# EAGLE board GB202-CC-from-SF-Base (EAGLE 7.2.0)
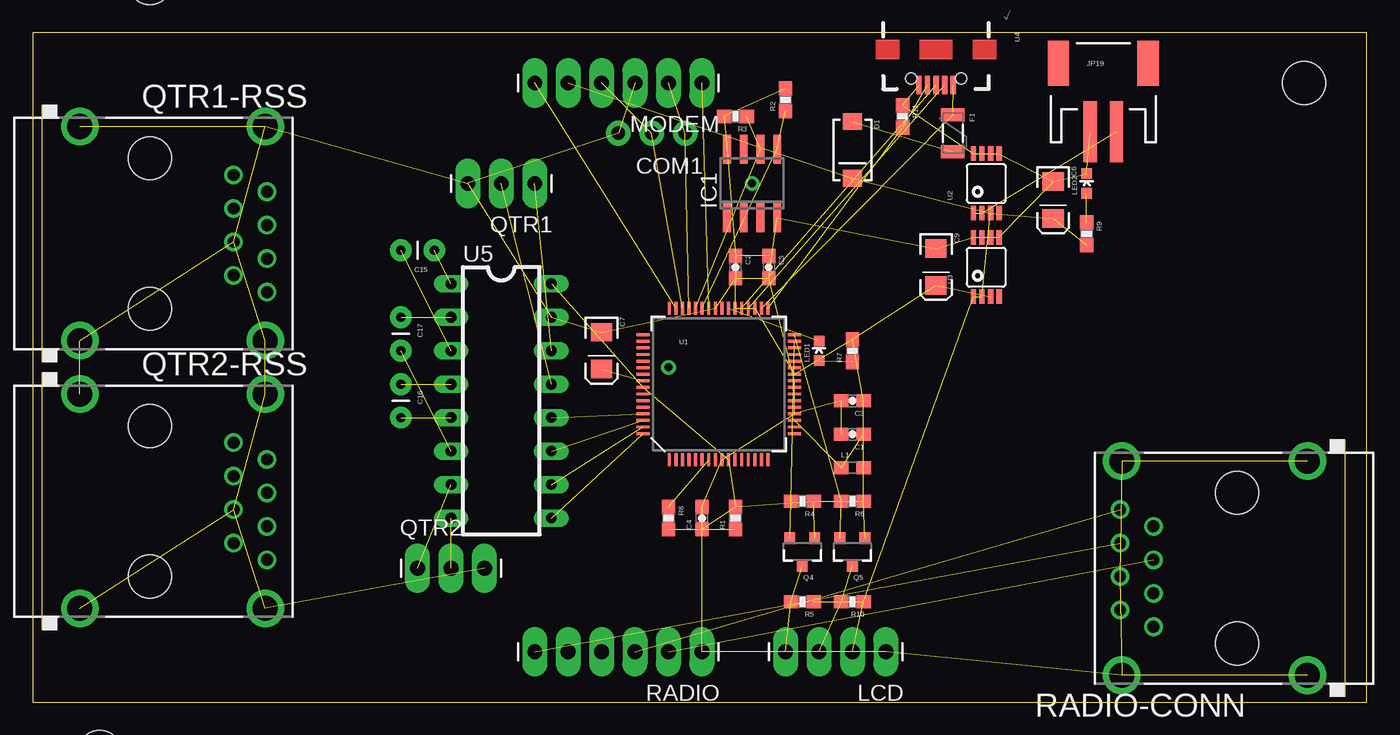
[diagram p0: board, top side]
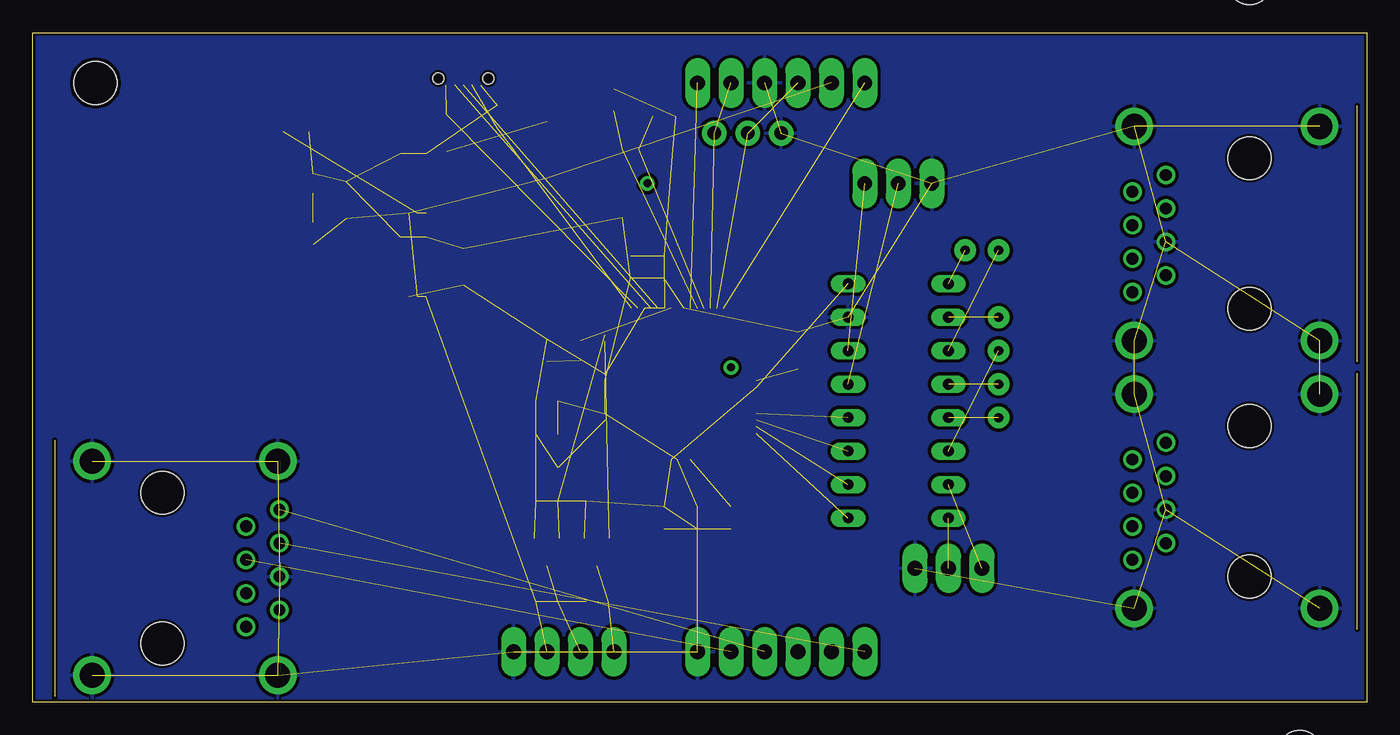
[diagram p1: board, bottom side, seen from below]

Size 101.27 x 50.79 mm. Coordinates in mm from the lower left corner, seen from the top.
Outline: 0,0 101.27,0 101.27,50.79 0,50.79 0,0
Copper layers (1*16): Top 0.035mm / dielectric 1.5mm / Bottom 0.035mm
Design rules "SparkFun-2-layer-STANDARD": minimum track width 10mil, minimum drill 20mil, track to track 10mil, track to pad 8mil, pad to pad 8mil, via to via 10mil, smd to smd 8mil, copper to edge 8mil, drill to drill 8mil, minimum pad ring 10mil, minimum via ring 10mil, stop-mask expansion 4mil, vias tented up to drill 20mil, thermal gap 10mil

## Footprints (pad centres in the part's own frame; a part is rotated, then mirrored left to right if it is on the bottom)
0603-CAP = smd 1.1 x 1: 1 -0.85,0; 2 0.85,0
EIA3216 = smd 1.4 x 1.6: A 1.4,0; C -1.4,0
CAP-PTH-SMALL = drill 0.7 pad 1.651: 1 0,0; 2 2.54,0
1X03_NO_SILK = drill 1.016 pad 1.88: 1 0,0; 2 2.54,0; 3 5.08,0
SMA-DIODE = smd 1.27 x 1.47: A -2.15,0; C 2.15,0
PTC-1206 = smd 1 x 1.8: 1 -1.4,0; 2 1.4,0
SO-08 = smd 0.6 x 2.2: 1 -1.905,-2.6; 2 -0.635,-2.6; 3 0.635,-2.6; 4 1.905,-2.6; 5 1.905,2.6; 6 0.635,2.6; 7 -0.635,2.6; 8 -1.905,2.6
STAND-OFF = hole 3.302: 0,0
JST-2-SMD = smd 1 x 4.6: 1 -1,-3.7; 2 1,-3.7 | smd 1.6 x 3.4: NC1 -3.4,1.5; NC2 3.4,1.5
0603 = smd 1.1 x 1: 1 -0.85,0; 2 0.85,0
1X04_LONGPADS = drill 1.118 pad 1.88 long: 1 0,0; 2 2.54,0; 3 5.08,0; 4 7.62,0
LED-0603 = smd 0.8 x 0.8: A 0,-0.75; C 0,0.75
1X06_LONGPADS = drill 1.118 pad 1.88 long: 1 0,0; 2 2.54,0; 3 5.08,0; 4 7.62,0; 5 10.16,0; 6 12.7,0
SOT23-3 = smd 0.8 x 0.9: 1 -0.95,-1; 2 0.95,-1; 3 0,1.1
1X03_LONGPADS = drill 1.118 pad 1.88 long: 1 0,0; 2 2.54,0; 3 5.08,0
RJ45-SHIELD2 = drill 0.9 pad 1.4: 1 -4.445,6.35; 2 -3.175,8.89; 3 -1.905,6.35; 4 -0.635,8.89; 5 0.635,6.35; 6 1.905,8.89; 7 3.175,6.35; 8 4.445,8.89 | drill 1.9 pad 2.5: S1 -8.128,-5.33; S2 8.128,-5.33; S3 -8.128,8.76; S4 8.128,8.76 | hole 3.251: -5.715,0; 5.715,0
0603-RES = smd 1.1 x 1: 1 -0.85,0; 2 0.85,0
PIC24FXXX_TQFP64 = smd 0.22 x 1: 1 -3.75,-5.75; 2 -3.25,-5.75; 3 -2.75,-5.75; 4 -2.25,-5.75; 5 -1.75,-5.75; 6 -1.25,-5.75; 7 -0.75,-5.75; 8 -0.25,-5.75; 9 0.25,-5.75; 10 0.75,-5.75; 11 1.25,-5.75; 12 1.75,-5.75; 13 2.25,-5.75; 14 2.75,-5.75; 15 3.25,-5.75; 16 3.75,-5.75; 33 3.75,5.75; 34 3.25,5.75; 35 2.75,5.75; 36 2.25,5.75; 37 1.75,5.75; 38 1.25,5.75; 39 0.75,5.75; 40 0.25,5.75; 41 -0.25,5.75; 42 -0.75,5.75; 43 -1.25,5.75; 44 -1.75,5.75; 45 -2.25,5.75; 46 -2.75,5.75; 47 -3.25,5.75; 48 -3.75,5.75 | smd 1 x 0.22: 17 5.75,-3.75; 18 5.75,-3.25; 19 5.75,-2.75; 20 5.75,-2.25; 21 5.75,-1.75; 22 5.75,-1.25; 23 5.75,-0.75; 24 5.75,-0.25; 25 5.75,0.25; 26 5.75,0.75; 27 5.75,1.25; 28 5.75,1.75; 29 5.75,2.25; 30 5.75,2.75; 31 5.75,3.25; 32 5.75,3.75; 49 -5.75,3.75; 50 -5.75,3.25; 51 -5.75,2.75; 52 -5.75,2.25; 53 -5.75,1.75; 54 -5.75,1.25; 55 -5.75,0.75; 56 -5.75,0.25; 57 -5.75,-0.25; 58 -5.75,-0.75; 59 -5.75,-1.25; 60 -5.75,-1.75; 61 -5.75,-2.25; 62 -5.75,-2.75; 63 -5.75,-3.25; 64 -5.75,-3.75
MSOP8 = smd 0.4 x 1.1: 1 -0.975,-2.25; 2 -0.325,-2.25; 3 0.325,-2.25; 4 0.975,-2.25; 5 0.975,2.25; 6 0.325,2.25; 7 -0.325,2.25; 8 -0.975,2.25
USB-AB-MICRO-SMD_V03 = smd 1.4 x 0.4: D+1 2.7,0; D-1 2.7,0.65; GND1 2.7,-1.3; ID1 2.7,-0.65; VBUS1 2.7,1.3 | hole 0.85: 2.2,1.9; 2.2,-1.9
DIL16 = drill 0.813 long: 1 -8.89,-3.81; 2 -6.35,-3.81; 3 -3.81,-3.81; 4 -1.27,-3.81; 5 1.27,-3.81; 6 3.81,-3.81; 7 6.35,-3.81; 8 8.89,-3.81; 9 8.89,3.81; 10 6.35,3.81; 11 3.81,3.81; 12 1.27,3.81; 13 -1.27,3.81; 14 -3.81,3.81; 15 -6.35,3.81; 16 -8.89,3.81

## Placement (x,y rotation side)
C1  0.1uF  [0603-CAP]  62.23,20.32 180 top
C2  0.1uF  [0603-CAP]  53.34,33.02 270 top
C3  0.1uF  [0603-CAP]  62.23,22.86 180 top
C4  0.1uF  [0603-CAP]  50.8,13.97 90 top
C5  0.1uF  [0603-CAP]  55.88,33.02 270 top
C6  10uf  [EIA3216]  77.47,38.1 270 top
C7  10uF  [EIA3216]  43.18,26.67 270 top
C9  10uf  [EIA3216]  68.58,33.02 270 top
C15  .1  [CAP-PTH-SMALL]  30.48,34.29 180 top
C16  .1  [CAP-PTH-SMALL]  27.94,24.13 270 top
C17  .1  [CAP-PTH-SMALL]  27.94,29.21 270 top
COM1  [1X03_NO_SILK]  49.53,43.18 180 top
D1  DIODE-SCHOTTKY_  [SMA-DIODE]  62.23,41.91 270 top
F1  PTCSMD  [PTC-1206]  69.85,43.18 270 top
IC1  24LCS61SN  [SO-08]  54.61,39.37 0 top
JP10  STAND-OFF  [STAND-OFF]  5.08,-3.81 0 top  (outside the outline)
JP11  STAND-OFF  [STAND-OFF]  107.95,5.08 0 top  (outside the outline)
JP12  STAND-OFF  [STAND-OFF]  96.52,46.99 0 top
JP13  STAND-OFF  [STAND-OFF]  8.89,54.61 0 top  (outside the outline)
JP19  JST Connector  [JST-2-SMD]  81.28,46.99 0 top
L1  30Ohm,1.8A  [0603]  62.23,17.78 0 top
LCD  [1X04_LONGPADS]  64.77,3.81 180 top
LED1  LY L29K-J1K2-26-Z  [LED-0603]  59.69,26.67 0 top
LED2  LS L29K-G1J2-1-Z  [LED-0603]  80.01,39.37 0 top
MODEM  [1X06_LONGPADS]  50.8,46.99 180 top
Q4  BSS138  [SOT23-3]  58.42,11.43 180 top
Q5  BSS138  [SOT23-3]  62.23,11.43 180 top
QTR1  [1X03_LONGPADS]  38.1,39.37 180 top
QTR1-RSS  RJ45-8L2-S  [RJ45-SHIELD2]  8.89,35.56 270 top
QTR2  [1X03_LONGPADS]  29.21,10.16 0 top
QTR2-RSS  RJ45-8L2-S  [RJ45-SHIELD2]  8.89,15.24 270 top
R1  10k  [0603-RES]  53.34,13.97 90 top
R2  4.7K  [0603-RES]  57.15,45.72 90 top
R3  4.7K  [0603-RES]  53.34,44.45 180 top
R4  10K  [0603-RES]  58.42,15.24 180 top
R5  10K  [0603-RES]  58.42,7.62 180 top
R6  10K  [0603-RES]  62.23,15.24 180 top
R7  750  [0603-RES]  62.23,26.67 90 top
R8  470  [0603-RES]  48.26,13.97 270 top
R9  1.6k  [0603-RES]  80.01,35.56 270 top
R10  10K  [0603-RES]  62.23,7.62 180 top
R11  DNP  [0603-RES]  66.04,44.45 270 top
RADIO  [1X06_LONGPADS]  50.8,3.81 180 top
RADIO-CONN  RJ45-8L2-S  [RJ45-SHIELD2]  91.44,10.16 90 top
U1  PIC24FJ256GB206  [PIC24FXXX_TQFP64]  52.07,24.13 0 top
U2  VREG_MIC5216  [MSOP8]  72.39,39.37 0 top
U3  VREG_MIC5216  [MSOP8]  72.39,33.02 0 top
U4  [USB-AB-MICRO-SMD_V03]  68.58,49.53 270 top
U5  MAX232PTH  [DIL16]  35.56,22.86 270 top

## Library data of the parts
C1-C6 C9 C15-C17 = SparkFun-Capacitors
C7 JP10-JP13 JP19 LED2 Q4 Q5 R4-R6 R10 R11 = SparkFun
COM1 MODEM QTR1 QTR2 RADIO = SparkFun-Connectors
D1 = SparkFun-DiscreteSemi
F1 U2 U3 = SparkFun-PowerIC
IC1 = microchip; OC_FARNELL: unknown; OC_NEWARK: unknown
L1 = SparkFun-Passives
LCD = SparkFun-Connectors; PROD_ID: CONN-09696
LED1 = SparkFun-LED
QTR1-RSS QTR2-RSS RADIO-CONN = con-tycoelectronics; MF: TYCO ELECTRONICS; MPN: RJ45-8L2-S; OC_FARNELL: unknown; OC_NEWARK: 52K4446
R1-R3 R7-R9 = SparkFun-Resistors
U1 U5 = SparkFun-DigitalIC
U4 = Testing

## Nets
3.3V: C2.1 C3.1 C4.1 C5.1 C9.A IC1.8 L1.2 Q4.1 Q5.1 R1.2 R2.2 R3.2 R4.1 R6.1 R7.2 U1.10 U1.26 U1.35 U1.38 U1.57 U3.3 U5.16
5V: C6.A D1.C LCD.2 MODEM.5 R5.1 R9.2 R10.1 U2.3 U3.1 U3.2
BOOT: LED1.C U1.39
D+: U1.37 U4.D+1
D-: U1.36 U4.D-1
ETH-SPI: U1.53
ETH-SPI2: U1.52
ETH-SPI3: U1.51
ETH-SPI4: U1.50
GND: C1.2 C2.2 C3.2 C4.2 C5.2 C6.C C7.C C9.C COM1.3 IC1.4 JP19.1 LCD.1 LED2.C MODEM.3 QTR1-RSS.5 QTR1-RSS.S1 QTR1-RSS.S2 QTR1-RSS.S3 QTR1-RSS.S4 QTR1.3 QTR2-RSS.5 QTR2-RSS.S1 QTR2-RSS.S2 QTR2-RSS.S3 QTR2-RSS.S4 QTR2.3 R11.1 RADIO-CONN.4 RADIO-CONN.S1 RADIO-CONN.S2 RADIO-CONN.S3 RADIO-CONN.S4 RADIO.1 U1.9 U1.20 U1.25 U1.41 U2.5 U2.6 U2.7 U2.8 U3.5 U3.6 U3.7 U3.8 U4.GND1 U5.15
HOST: U1.40
HV-SCL: LCD.3 Q5.3 R10.2
HV-SDA: LCD.4 Q4.3 R5.2
LV-SCL2: Q5.2 R6.2 U1.32
LV-SDA2: Q4.2 R4.2 U1.31
MCLR: R8.1 U1.7
MODEM-PTT: MODEM.6 U1.47
MODEM-RXD: COM1.2 MODEM.4 U1.46
MODEM-TXD: COM1.1 MODEM.2 U1.45
N$2: LED1.A R7.1
N$3: LED2.A R9.1
N$4: D1.A F1.2
N$5: C7.A U1.56
N$7: QTR1-RSS.3
N$8: QTR1-RSS.2
N$9: C1.1 L1.1 U1.19
N$10: QTR2-RSS.3
N$11: QTR2-RSS.2
N$23: C15.1 U5.1
N$25: C15.2 U5.3
N$26: C16.1 U5.4
N$27: C16.2 U5.5
N$28: C17.2 U5.6
N$29: C17.1 U5.2
P7: R1.1 R8.2
PIN9: U1.48
PIN10: U1.49
PIN15: U1.54
PIN16: U1.55
PIN17: U1.58
PIN18: U1.59
PIN19: U1.60
PIN24: U1.1
PIN25: U1.2
PIN26: U1.3
PIN27: U1.4
PIN28: U1.5
PIN29: U1.6
PIN30: U1.8
PIN31: U1.11
PIN32: U1.12
PIN33: U1.13
PIN34: U1.14
PIN35: U1.15
PIN36: U1.16
PIN37: U1.17
PIN38: U1.18
PIN39: U1.21
PIN40: U1.22
PIN41: U1.23
PIN42: U1.24
PIN43: U1.27
PIN44: U1.28
PIN45: U1.29
PIN46: U1.30
QTR1-RX: QTR1.2 U5.13
QTR1-RXD: U1.61 U5.12
QTR1-TX: QTR1.1 U5.14
QTR1-TXD: U1.62 U5.11
QTR2-RX: QTR2.2 U5.8
QTR2-RXD: U1.64 U5.9
QTR2-TX: QTR2.1 U5.7
QTR2-TXD: U1.63 U5.10
RAD-PTT: RADIO-CONN.6 RADIO.6
RAD-RX: RADIO-CONN.8 RADIO.3
RAD-TX: RADIO-CONN.5 RADIO.2
SCL1: IC1.6 R3.1 U1.44
SDA1: IC1.5 R2.1 U1.43
TX-MUTE: MODEM.1 U1.42
USBID: R11.2 U1.33 U4.ID1
VBUS: F1.1 U1.34 U4.VBUS1
VIN: JP19.2 U2.1 U2.2

## Tracks (layer width: path | path; a pad name or v marks a point on that pad's centre or on a via)
3.3V  (21 unrouted)
5V  (9 unrouted)
BOOT  (1 unrouted)
D+  (1 unrouted)
D-  (1 unrouted)
GND  (46 unrouted)
  pour Bottom: 0,50.8 0,0 101.6,0 101.6,50.8
HV-SCL  (2 unrouted)
HV-SDA  (2 unrouted)
LV-SCL2  (2 unrouted)
LV-SDA2  (2 unrouted)
MCLR  (1 unrouted)
MODEM-PTT  (1 unrouted)
MODEM-RXD  (2 unrouted)
MODEM-TXD  (2 unrouted)
N$1  (via drill 0.6)
  other vias: 54.61,39.37
N$2  (1 unrouted)
N$3  (1 unrouted)
N$4  (1 unrouted)
N$5  (1 unrouted)
N$6  (via drill 0.6)
  other vias: 48.26,25.4
N$9  (2 unrouted)
N$23  (1 unrouted)
N$25  (1 unrouted)
N$26  (1 unrouted)
N$27  (1 unrouted)
N$28  (1 unrouted)
N$29  (1 unrouted)
P7  (1 unrouted)
QTR1-RX  (1 unrouted)
QTR1-RXD  (1 unrouted)
QTR1-TX  (1 unrouted)
QTR1-TXD  (1 unrouted)
QTR2-RX  (1 unrouted)
QTR2-RXD  (1 unrouted)
QTR2-TX  (1 unrouted)
QTR2-TXD  (1 unrouted)
RAD-PTT  (1 unrouted)
RAD-RX  (1 unrouted)
RAD-TX  (1 unrouted)
SCL1  (2 unrouted)
SDA1  (2 unrouted)
TX-MUTE  (1 unrouted)
USBID  (2 unrouted)
VBUS  (2 unrouted)
VIN  (2 unrouted)